# EAGLE board AK4493-v1.64 (EAGLE 9.6.2)

No outline drawn. Coordinates in mm, seen from the top.
Copper layers (1*16): Top 0.035mm / dielectric 0.15mm / Bottom 0.035mm
Design rules "default": minimum track width 6mil, minimum drill 0.35mm, track to track 6mil, track to pad 6mil, pad to pad 6mil, via to via 6mil, smd to smd 6mil, copper to edge 40mil, drill to drill 6mil, minimum pad ring 10mil, minimum via ring 8mil, stop-mask expansion 4mil, vias tented up to drill 0mil, thermal gap 10mil

## Footprints (pad centres in the part's own frame; a part is rotated, then mirrored left to right if it is on the bottom)
22-23-2021 = drill 1 long: 1 -1.27,0; 2 1.27,0
U.FL = smd 2.2 x 0.85: 1 0,1.375; 2 0,-1.375 | smd 1.05 x 1: FEED 1.525,0; NC -1.525,0
C0805K = smd 1.3 x 1.6: 1 -1,0; 2 1,0
C0603K = smd 1.05 x 1.08: 1 -0.875,0; 2 0.875,0
E2,5-5 = drill 0.813 pad 1.6: + -1.27,0 | drill 0.813 pad 1.6 octagon: - 1.27,0
E5-8,5 = drill 1.016 pad 2.54: + -2.54,0 | drill 1.016 pad 2.54 octagon: - 2.54,0
E2-4 = drill 0.813 pad 1.27: + -1.016,0 | drill 0.813 pad 1.27 octagon: - 1.016,0
C1206K = smd 1.5 x 2: 1 -1.5,0; 2 1.5,0
E2,5-7 = drill 0.813 pad 1.6: + -1.27,0 | drill 0.813 pad 1.6 octagon: - 1.27,0
22-23-2081 = drill 1 long: 1 -8.89,0; 2 -6.35,0; 3 -3.81,0; 4 -1.27,0; 5 1.27,0; 6 3.81,0; 7 6.35,0; 8 8.89,0
SOP50P490X110-11N = smd 1.425 x 0.3: 1 -2.212,1; 2 -2.212,0.5; 3 -2.212,0; 4 -2.212,-0.5; 5 -2.212,-1; 6 2.212,-1; 7 2.212,-0.5; 8 2.212,0; 9 2.212,0.5; 10 2.212,1 | smd 1.68 x 1.88: 11 0,0
8-PIN = smd 1.7 x 2.15: 1 -2.54,-2.1; 2 0,-2.1; 3 2.54,-2.1; 4 2.54,2.1; 5 0,2.1; 6 -2.54,2.1 | smd 1.545 x 1.3: 7 -2.853,0; 8 2.853,0
LQFP48 = smd 0.25 x 1: 1 -2.75,-4.25; 2 -2.25,-4.25; 3 -1.75,-4.25; 4 -1.25,-4.25; 5 -0.75,-4.25; 6 -0.25,-4.25; 7 0.25,-4.25; 8 0.75,-4.25; 9 1.25,-4.25; 10 1.75,-4.25; 11 2.25,-4.25; 12 2.75,-4.25; 25 2.75,4.25; 26 2.25,4.25; 27 1.75,4.25; 28 1.25,4.25; 29 0.75,4.25; 30 0.25,4.25; 31 -0.25,4.25; 32 -0.75,4.25; 33 -1.25,4.25; 34 -1.75,4.25; 35 -2.25,4.25; 36 -2.75,4.25 | smd 1 x 0.25: 13 4.25,-2.75; 14 4.25,-2.25; 15 4.25,-1.75; 16 4.25,-1.25; 17 4.25,-0.75; 18 4.25,-0.25; 19 4.25,0.25; 20 4.25,0.75; 21 4.25,1.25; 22 4.25,1.75; 23 4.25,2.25; 24 4.25,2.75; 37 -4.25,2.75; 38 -4.25,2.25; 39 -4.25,1.75; 40 -4.25,1.25; 41 -4.25,0.75; 42 -4.25,0.25; 43 -4.25,-0.25; 44 -4.25,-0.75; 45 -4.25,-1.25; 46 -4.25,-1.75; 47 -4.25,-2.25; 48 -4.25,-2.75
SOP65P640X120-20N = smd 1.475 x 0.45: 1 -2.938,2.925; 2 -2.938,2.275; 3 -2.938,1.625; 4 -2.938,0.975; 5 -2.938,0.325; 6 -2.938,-0.325; 7 -2.938,-0.975; 8 -2.938,-1.625; 9 -2.938,-2.275; 10 -2.938,-2.925; 11 2.938,-2.925; 12 2.938,-2.275; 13 2.938,-1.625; 14 2.938,-0.975; 15 2.938,-0.325; 16 2.938,0.325; 17 2.938,0.975; 18 2.938,1.625; 19 2.938,2.275; 20 2.938,2.925
SOT95P280X145-5N = smd 1.2 x 0.6: 1 -1.25,0.95; 2 -1.25,0; 3 -1.25,-0.95; 4 1.25,-0.95; 5 1.25,0.95
R0603 = smd 1 x 1.1: 1 -0.85,0; 2 0.85,0
R0805 = smd 1.3 x 1.5: 1 -0.95,0; 2 0.95,0
22-23-2071 = drill 1 long: 1 -7.62,0; 2 -5.08,0; 3 -2.54,0; 4 0,0; 5 2.54,0; 6 5.08,0; 7 7.62,0

## Placement (x,y rotation side)
AVDDL  22-23-2021  [22-23-2021]  -49.53,-102.87 0 top
AVDDR  22-23-2021  [22-23-2021]  -55.88,-102.87 0 top
BCLK  U.FL  [U.FL]  -43.18,-69.85 0 top
C1A  [C0805K]  -63.5,-254 0 top
C2A  [C0603K]  -63.5,-311.15 0 top
C2B  [C0603K]  -63.5,-314.96 0 top
C3A  [E2,5-5]  -62.23,-403.86 0 top
C3B  [E2,5-5]  -62.23,-410.21 0 top
C4A  [C0603K]  -63.5,-318.77 0 top
C4B  [C0603K]  -63.5,-322.58 0 top
C5A  [E2,5-5]  -62.23,-416.56 0 top
C5B  [E2,5-5]  -62.23,-422.91 0 top
C6A  [C0603K]  -63.5,-326.39 0 top
C6B  [C0603K]  -63.5,-330.2 0 top
C7A  [E5-8,5]  -59.69,-430.53 0 top
C7B  [E5-8,5]  -59.69,-440.69 0 top
C8A  [C0603K]  -63.5,-334.01 0 top
C8B  [C0603K]  -63.5,-337.82 0 top
C9A  [E2-4]  -62.23,-468.63 0 top
C9B  [E2-4]  -62.23,-473.71 0 top
C10A  [C0603K]  -63.5,-341.63 0 top
C10B  [C0603K]  -63.5,-345.44 0 top
C11A  [E5-8,5]  -59.69,-450.85 0 top
C11B  [E5-8,5]  -59.69,-461.01 0 top
C12A  [C0603K]  -63.5,-349.25 0 top
C12B  [C0603K]  -63.5,-353.06 0 top
C13A  [E2-4]  -62.23,-478.79 0 top
C13B  [E2-4]  -62.23,-483.87 0 top
C14A  [C0603K]  -59.69,-353.06 0 top
C14B  [C0603K]  -55.88,-353.06 0 top
C15A  [E2-4]  -62.23,-488.95 0 top
C15B  [E2-4]  -62.23,-494.03 0 top
C16A  [C0603K]  -63.5,-356.87 0 top
C16B  [C0603K]  -59.69,-356.87 0 top
C17A  [E2-4]  -62.23,-499.11 0 top
C17B  [E2-4]  -62.23,-504.19 0 top
C18A  [C0805K]  -63.5,-280.67 0 top
C18B  [C0805K]  -63.5,-284.48 0 top
C18C  [C0805K]  -63.5,-288.29 0 top
C18D  [C0805K]  -63.5,-292.1 0 top
C18E  [C0805K]  -63.5,-295.91 0 top
C18F  [C0805K]  -59.69,-295.91 0 top
C19A  [C1206K]  -62.23,-368.3 0 top
C19B  [C1206K]  -62.23,-372.11 0 top
C19C  [C1206K]  -62.23,-375.92 0 top
C19D  [C1206K]  -62.23,-379.73 0 top
C19E  [C1206K]  -62.23,-383.54 0 top
C19F  [C1206K]  -62.23,-387.35 0 top
C20A  [C0805K]  -55.88,-295.91 0 top
C20B  [C0805K]  -63.5,-299.72 0 top
C20C  [C0805K]  -59.69,-299.72 0 top
C20D  [C0805K]  -55.88,-299.72 0 top
C20E  [C0805K]  -63.5,-303.53 0 top
C20F  [C0805K]  -59.69,-303.53 0 top
C21A  [C0805K]  -63.5,-257.81 0 top
C21B  [C0805K]  -63.5,-261.62 0 top
C21C  [C0805K]  -63.5,-265.43 0 top
C21D  [C0805K]  -63.5,-269.24 0 top
C21E  [C0805K]  -63.5,-273.05 0 top
C21F  [C0805K]  -63.5,-276.86 0 top
C22A  [C0603K]  -55.88,-356.87 0 top
C23A  [C0603K]  -63.5,-360.68 0 top
C24A  [C0603K]  -59.69,-360.68 0 top
C25A  [E2,5-7]  -60.96,-518.16 0 top
C25B  [E2,5-7]  -60.96,-510.54 0 top
C25C  [E2,5-7]  -60.96,-525.78 0 top
C26A  [C0805K]  -55.88,-303.53 0 top
C26B  [C0805K]  -63.5,-307.34 0 top
C27A  [C0805K]  -63.5,-391.16 0 top
C27B  [C0805K]  -63.5,-394.97 0 top
C28A  [C0603K]  -55.88,-360.68 0 top
C28B  [C0603K]  -63.5,-364.49 0 top
C29  [C0603K]  -59.69,-364.49 0 top
C30  [C0805K]  -63.5,-398.78 0 top
C31  [E2,5-5]  -62.23,-533.4 0 top
CONTROL  22-23-2081  [22-23-2081]  -34.29,-102.87 0 top
DATA  U.FL  [U.FL]  -38.1,-69.85 0 top
DVDD  22-23-2021  [22-23-2021]  -62.23,-102.87 0 top
IC1  LT3042  [SOP50P490X110-11N]  -7.62,-25.4 0 top
IC1A  SI570  [8-PIN]  -16.51,-20.32 0 top
IC2  AK4493  [LQFP48]  -5.08,-17.78 0 top
IC3A  AK4493  [LQFP48]  -21.59,-45.72 0 top
IC4  LT3042  [SOP50P490X110-11N]  -24.13,-53.34 0 top
IC4A  PO74G374A  [SOP65P640X120-20N]  -21.59,-31.75 0 top
IC5  LT3042  [SOP50P490X110-11N]  -24.13,-57.15 0 top
IC6  LT3042  [SOP50P490X110-11N]  -24.13,-60.96 0 top
IC7  LT3042  [SOP50P490X110-11N]  -24.13,-64.77 0 top
IC8  LT3042  [SOP50P490X110-11N]  -24.13,-68.58 0 top
LDO7  LP5907-1.8V  [SOT95P280X145-5N]  -24.13,-72.39 0 top
LDO8  LP5907-1.8V  [SOT95P280X145-5N]  -22.86,-38.1 0 top
LRCK  U.FL  [U.FL]  -33.02,-69.85 0 top
MCLK  U.FL  [U.FL]  -24.13,-22.86 0 top
R1A  [R0603]  -63.5,-111.76 0 top
R1B  [R0603]  -63.5,-115.57 0 top
R2A  [R0603]  -63.5,-119.38 0 top
R2B  [R0603]  -63.5,-123.19 0 top
R3A  [R0603]  -63.5,-127 0 top
R3B  [R0603]  -63.5,-130.81 0 top
R4A  [R0603]  -63.5,-134.62 0 top
R4B  [R0603]  -63.5,-138.43 0 top
R5A  [R0805]  -62.23,-143.51 0 top
R6A  [R0805]  -62.23,-148.59 0 top
R6B  [R0805]  -62.23,-153.67 0 top
R6C  [R0805]  -62.23,-158.75 0 top
R6D  [R0805]  -62.23,-163.83 0 top
R6E  [R0805]  -62.23,-168.91 0 top
R6F  [R0805]  -62.23,-173.99 0 top
R7A  [R0805]  -62.23,-179.07 0 top
R7B  [R0805]  -62.23,-184.15 0 top
R7C  [R0805]  -62.23,-189.23 0 top
R7D  [R0805]  -62.23,-194.31 0 top
R7E  [R0805]  -62.23,-199.39 0 top
R7F  [R0805]  -62.23,-204.47 0 top
R8A  [R0805]  -62.23,-209.55 0 top
R8B  [R0805]  -62.23,-214.63 0 top
R8C  [R0805]  -62.23,-219.71 0 top
R8D  [R0805]  -62.23,-224.79 0 top
R8E  [R0805]  -62.23,-229.87 0 top
R8F  [R0805]  -62.23,-234.95 0 top
R10  [R0805]  -62.23,-240.03 0 top
R20  [R0805]  -62.23,-245.11 0 top
R21A  [R0805]  -62.23,-250.19 0 top
X1  22-23-2071  [22-23-2071]  -35.56,-80.01 0 top
X2  22-23-2071  [22-23-2071]  -35.56,-91.44 0 top

## Library data of the parts
AVDDL AVDDR DVDD = con-molex; MF: MOLEX; MPN: 22-23-2021; OC_FARNELL: 1462926; OC_NEWARK: 25C3832
BCLK DATA LRCK MCLK = SparkFun-Connectors; PROD_ID: CONN-09193; SF_ID: WRL-09144
C1A C2A C2B C3A C3B C4A C4B C5A C5B C6A C6B C7A C7B C8A C8B C9A C9B C10A C10B C11A C11B C12A C12B C13A C13B C14A C14B C15A C15B C16A C16B C17A C17B C18A C18B C18C C18D C18E C18F C19A C19B C19C C19D C19E C19F C20A C20B C20C C20D C20E C20F C21A C21B C21C C21D C21E C21F C22A C23A C24A C25A C25B C25C C26A C26B C27A C27B C28A C28B C29-C31 = rcl; SPICEPREFIX: C
CONTROL = con-molex; MF: MOLEX; MPN: 22-23-2081; OC_FARNELL: 1756826; OC_NEWARK: 01C7592
IC1 IC4-IC8 = LT3042EMSE#PBF; DESCRIPTION: LINEAR TECHNOLOGY - LT3042EMSE#PBF - LDO, ADJ, 0.2A, 0V-15V, MSOP-10; HEIGHT: 1.1mm; MANUFACTURER_NAME: Linear Technology; MANUFACTURER_PART_NUMBER: LT3042EMSE#PBF; MOUSER_PART_NUMBER: 584-LT3042EMSE#PBF; MOUSER_PRICE-STOCK: https://www.mouser.co.uk/ProductDetail/Analog-Devices-Linear-Technology/LT3042EMSEPBF?qs=oahfZPh6IAJ3XP16d20ITw%3D%3D
IC1A = silabs; OC_FARNELL: unknown; OC_NEWARK: unknown
IC2 IC3A = akm
IC4A = PO74G374A
LDO7 LDO8 = LP5907-1.8V; ARROW_PART_NUMBER: LP5907MFX-1.8/NOPB; ARROW_PRICE-STOCK: https://www.arrow.com/en/products/lp5907mfx-1.8nopb/texas-instruments?region=nac; DESCRIPTION: 250-mA ultra-low-noise low-IQ low-dropout (LDO) linear regulator; HEIGHT: 1.45mm; MANUFACTURER_NAME: Texas Instruments; MANUFACTURER_PART_NUMBER: LP5907MFX-1.8/NOPB; MOUSER_PART_NUMBER: 595-LP5907MFX-1.8NPB; MOUSER_PRICE-STOCK: https://www.mouser.co.uk/ProductDetail/Texas-Instruments/LP5907MFX-1.8-NOPB?qs=biyDIajrTn5jh5ArkSZeqw%3D%3D
R1A R1B R2A R2B R3A R3B R4A R4B R5A R6A R6B R6C R6D R6E R6F R7A R7B R7C R7D R7E R7F R8A R8B R8C R8D R8E R8F R10 R20 R21A = rcl; SPICEPREFIX: R
X1 X2 = con-molex; MF: MOLEX; MPN: 22-23-2071; OC_FARNELL: 1654534; OC_NEWARK: 56H0445

## Nets
+3V3: C2A.1 C2B.1 C3A.+ C3B.+ C18D.2 C22A.2 C23A.2 C24A.2 C26A.1 C26B.1 CONTROL.8 IC2.12 IC2.14 IC2.15 IC2.17 IC2.48 IC3A.14 IC3A.15 IC3A.17 IC3A.48 IC4A.20 IC5.9 IC5.10 LDO7.1 LDO7.3 LDO8.1 LDO8.3 R5A.2 R10.1 R20.1
+5V: C6A.1 C7A.+ C10A.1 C11A.+ C14A.1 C15A.+ C16A.1 C17A.+ C18A.2 IC2.19 IC2.20 IC2.27 IC2.28 IC2.33 IC2.34 IC2.41 IC2.42 IC8.9 IC8.10
DGND: AVDDL.2 AVDDR.2 BCLK.1 BCLK.2 C1A.2 C2A.2 C2B.2 C3A.- C3B.- C4A.2 C4B.2 C5A.- C5B.- C6A.2 C6B.2 C7A.- C7B.- C8A.2 C8B.2 C9A.- C9B.- C10A.2 C10B.2 C11A.- C11B.- C12A.2 C12B.2 C13A.- C13B.- C14A.2 C14B.2 C15A.- C15B.- C16A.2 C16B.2 C17A.- C17B.- C18A.1 C18B.1 C18C.1 C18D.1 C18E.1 C18F.1 C19A.1 C19B.1 C19C.1 C19D.1 C19E.1 C19F.1 C20A.1 C20B.1 C20C.1 C20D.1 C20E.1 C20F.1 C21A.1 C21B.1 C21C.1 C21D.1 C21E.1 C21F.1 C22A.1 C23A.1 C24A.1 C25A.- C25B.- C25C.- C26A.2 C26B.2 C27A.2 C27B.2 C28A.2 C28B.2 C29.2 C30.2 C31.- CONTROL.3 DATA.1 DATA.2 DVDD.2 IC1.8 IC1.11 IC1A.3 IC2.6 IC2.13 IC2.16 IC2.21 IC2.22 IC2.24 IC2.29 IC2.30 IC2.31 IC2.32 IC2.39 IC2.40 IC2.45 IC2.47 IC3A.6 IC3A.7 IC3A.12 IC3A.13 IC3A.16 IC3A.21 IC3A.22 IC3A.24 IC3A.29 IC3A.30 IC3A.31 IC3A.32 IC3A.39 IC3A.40 IC3A.45 IC3A.47 IC4.8 IC4.11 IC4A.7 IC4A.10 IC4A.17 IC5.8 IC5.11 IC6.8 IC6.11 IC7.8 IC7.11 IC8.8 IC8.11 LDO7.2 LDO8.2 LRCK.1 LRCK.2 MCLK.1 MCLK.2 R6A.2 R6B.2 R6C.2 R6D.2 R6E.2 R6F.2 R7A.2 R7B.2 R7C.2 R7D.2 R7E.2 R7F.2 R21A.1 X1.2 X1.6 X2.2 X2.6
N$1: IC1A.4 IC4A.11 MCLK.FEED R4A.1 R4B.1
N$2: IC2.36 X1.7
N$3: IC2.35 X1.5
N$4: IC4A.3 IC4A.13 LRCK.FEED
N$5: DATA.FEED IC4A.4 IC4A.14
N$6: IC2.25 X1.1
N$7: IC2.26 X1.3
N$8: BCLK.FEED IC4A.8 IC4A.18
N$9: IC3A.36 X2.7
N$10: IC3A.35 X2.5
N$11: IC3A.25 X2.1
N$12: IC3A.26 X2.3
N$13: CONTROL.2 IC1A.8 IC2.8 R10.2
N$14: CONTROL.1 IC1A.7 IC2.9 R20.2
N$15: CONTROL.7 IC1A.2
N$16: CONTROL.6 IC2.11
N$17: CONTROL.5 IC2.10
N$18: C8A.1 C9A.+ IC2.38
N$19: IC2.5 R3A.2
N$20: IC2.4 R2A.2
N$21: IC2.3 R1A.2
N$22: IC2.46 R4A.2
N$23: IC4A.19 R1A.1
N$24: IC4A.15 R2A.1
N$25: IC4A.12 R3A.1
N$26: IC3A.46 R4B.2
N$27: IC3A.3 R1B.2
N$28: IC3A.4 R2B.2
N$29: IC3A.5 R3B.2
N$30: IC4A.9 R1B.1
N$31: IC4A.5 R2B.1
N$32: IC4A.2 R3B.1
N$33: IC4A.1 R21A.2
N$34: C6B.1 C7B.+ C10B.1 C11B.+ C14B.1 C15B.+ C16B.1 C17B.+ C18B.2 IC3A.19 IC3A.20 IC3A.27 IC3A.28 IC3A.33 IC3A.34 IC3A.41 IC3A.42 IC6.9 IC6.10
N$35: IC7.5 R6C.1
N$36: C19C.2 IC7.7 R7C.1
N$37: C27A.1 C28A.1 IC2.1 LDO7.5
N$38: IC1.5 R6F.1
N$39: IC7.4 R8C.2
N$40: AVDDL.1 C20A.2 C20C.2 C21A.2 C21C.2 C25A.+ IC7.1 IC7.2 IC7.3 IC8.1 IC8.2 IC8.3 R8A.1 R8C.1
N$41: IC8.5 R6A.1
N$42: C19A.2 IC8.7 R7A.1
N$43: IC8.4 R8A.2
N$45: C4A.1 C5A.+ C18C.2 IC2.44 IC7.9 IC7.10
N$46: C4B.1 C5B.+ C18F.2 IC1.9 IC1.10 IC3A.44
N$47: C18E.2 C29.1 C30.1 C31.+ IC1A.6 IC4.9 IC4.10
N$48: IC4.5 R6E.1
N$49: C19E.2 IC4.7 R7E.1
N$50: IC4.4 R8E.2
N$51: C12B.1 C13B.+ IC3A.23
N$52: C8B.1 C9B.+ IC3A.38
N$53: C19F.2 IC1.7 R7F.1
N$54: IC1.4 R8F.2
N$57: IC5.5 R6D.1
N$58: C19D.2 IC5.7 R7D.1
N$59: IC5.4 R8D.2
N$60: C20D.2 C20E.2 C21D.2 C21E.2 C25C.+ DVDD.1 IC4.1 IC4.2 IC4.3 IC5.1 IC5.2 IC5.3 R8D.1 R8E.1
N$61: IC6.5 R6B.1
N$62: IC6.4 R8B.2
N$63: AVDDR.1 C20B.2 C20F.2 C21B.2 C21F.2 C25B.+ IC1.1 IC1.2 IC1.3 IC6.1 IC6.2 IC6.3 R8B.1 R8F.1
N$64: C19B.2 IC6.7 R7B.1
N$66: C27B.1 C28B.1 IC3A.1 LDO8.5
N$67: C1A.1 CONTROL.4 IC2.2 IC3A.2 R5A.1
N$70: C12A.1 C13A.+ IC2.23

## Tracks (layer width: path | path; a pad name or v marks a point on that pad's centre or on a via)
+3V3  (29 unrouted)
+5V  (18 unrouted)
DGND  (148 unrouted)
N$1  (4 unrouted)
N$2  (1 unrouted)
N$3  (1 unrouted)
N$4  (2 unrouted)
N$5  (2 unrouted)
N$6  (1 unrouted)
N$7  (1 unrouted)
N$8  (2 unrouted)
N$9  (1 unrouted)
N$10  (1 unrouted)
N$11  (1 unrouted)
N$12  (1 unrouted)
N$13  (3 unrouted)
N$14  (3 unrouted)
N$15  (1 unrouted)
N$16  (1 unrouted)
N$17  (1 unrouted)
N$18  (2 unrouted)
N$19  (1 unrouted)
N$20  (1 unrouted)
N$21  (1 unrouted)
N$22  (1 unrouted)
N$23  (1 unrouted)
N$24  (1 unrouted)
N$25  (1 unrouted)
N$26  (1 unrouted)
N$27  (1 unrouted)
N$28  (1 unrouted)
N$29  (1 unrouted)
N$30  (1 unrouted)
N$31  (1 unrouted)
N$32  (1 unrouted)
N$33  (1 unrouted)
N$34  (18 unrouted)
N$35  (1 unrouted)
N$36  (2 unrouted)
N$37  (3 unrouted)
N$38  (1 unrouted)
N$39  (1 unrouted)
N$40  (13 unrouted)
N$41  (1 unrouted)
N$42  (2 unrouted)
N$43  (1 unrouted)
N$45  (5 unrouted)
N$46  (5 unrouted)
N$47  (6 unrouted)
N$48  (1 unrouted)
N$49  (2 unrouted)
N$50  (1 unrouted)
N$51  (2 unrouted)
N$52  (2 unrouted)
N$53  (2 unrouted)
N$54  (1 unrouted)
N$57  (1 unrouted)
N$58  (2 unrouted)
N$59  (1 unrouted)
N$60  (13 unrouted)
N$61  (1 unrouted)
N$62  (1 unrouted)
N$63  (13 unrouted)
N$64  (2 unrouted)
N$66  (3 unrouted)
N$67  (4 unrouted)
N$70  (2 unrouted)